# EAGLE board sensor_board_v0.7 (EAGLE 7.6.0)
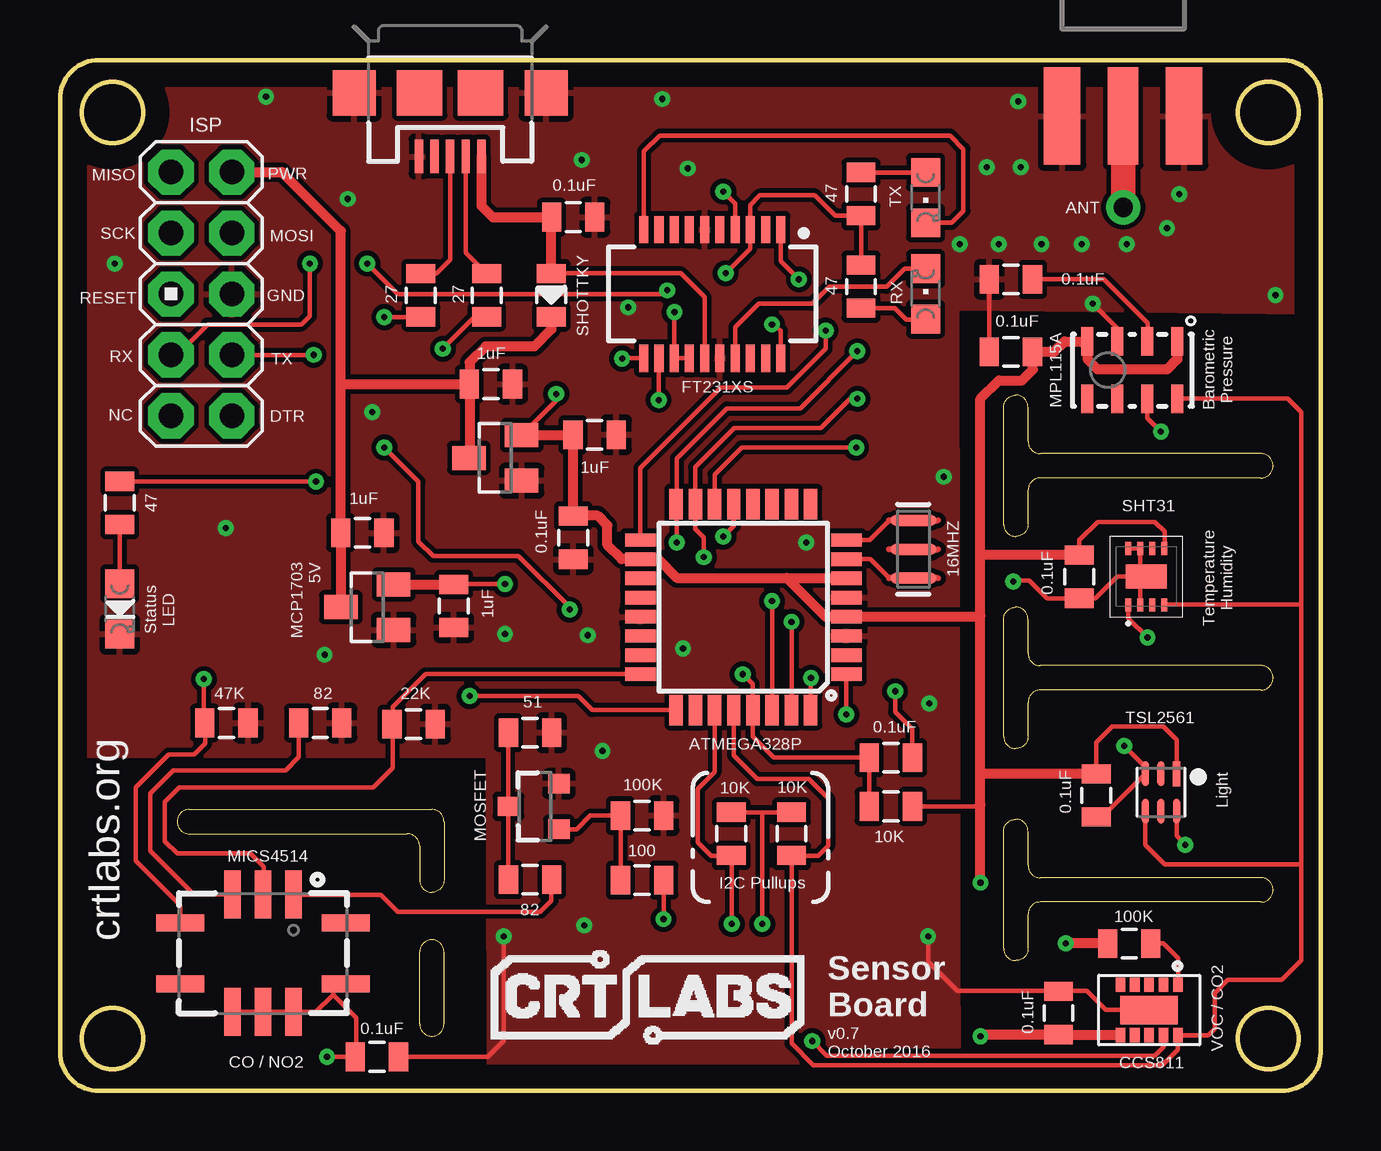
[diagram p0: board, top side]
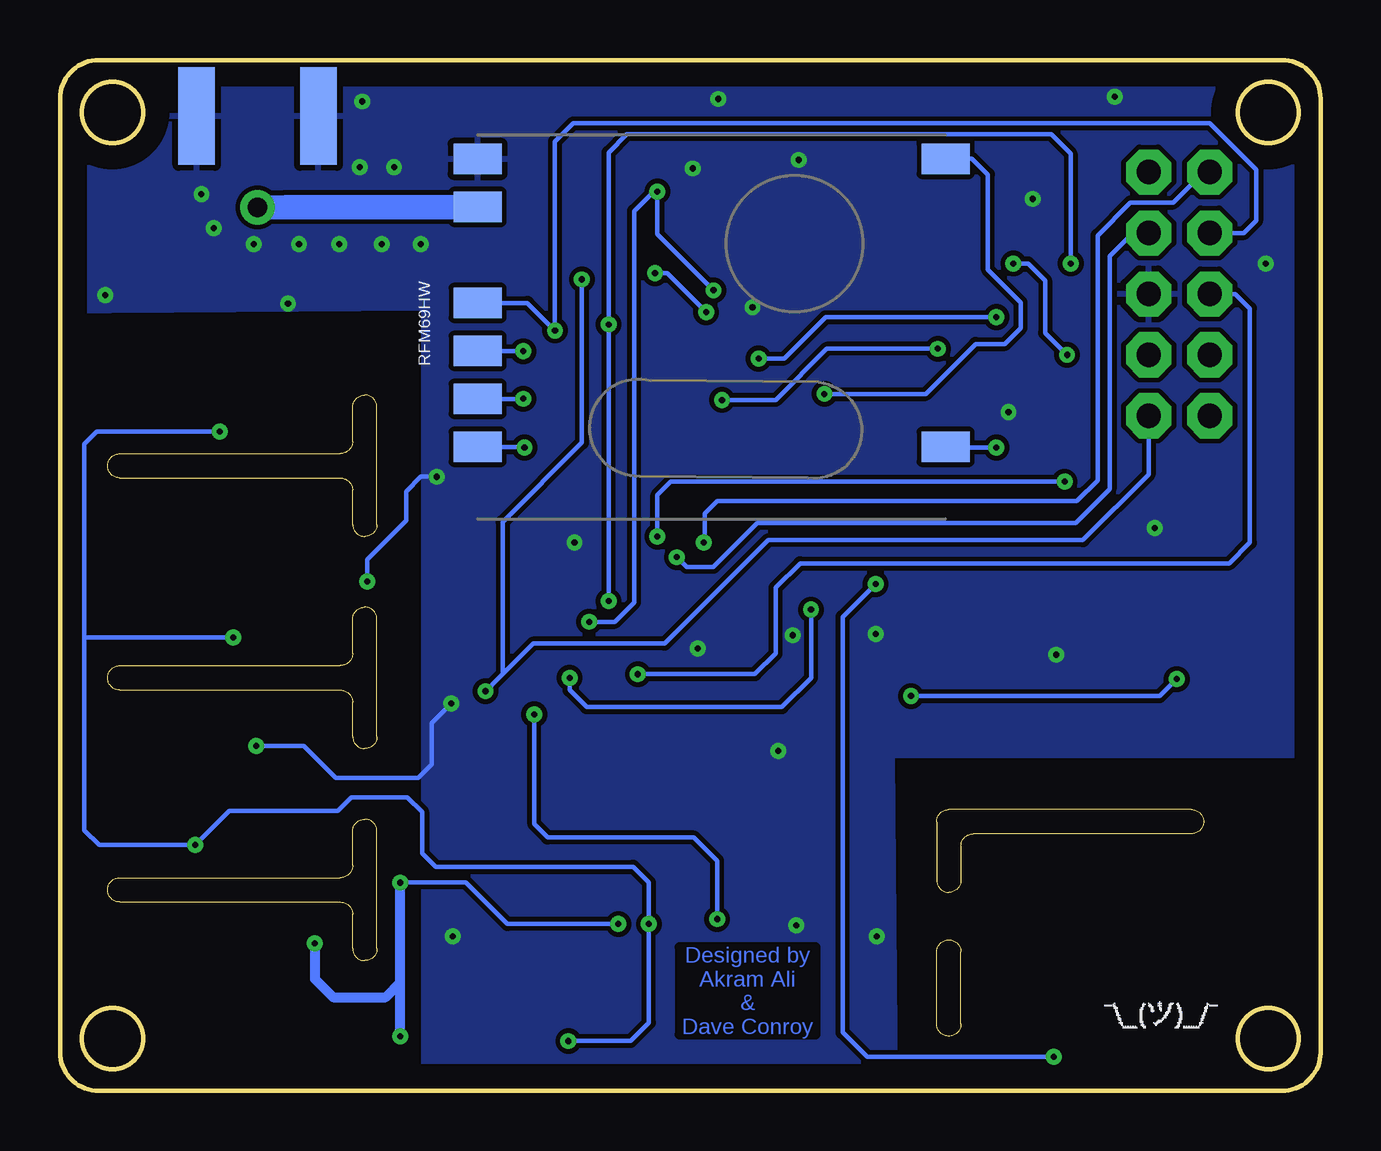
[diagram p1: board, bottom side, seen from below]

Size 52.53 x 42.98 mm. Coordinates in mm from the lower left corner, seen from the top.
Outline: 0,41.35 arc-90 1.63,42.98 50.95,42.98
Outline: 0,1.63 arc90 1.63,0 50.95,0
Outline: 0,41.4 0,1.52
Outline: 50.9,0 arc90 52.53,1.63
Outline: 50.9,42.98 arc-90 52.53,41.35 52.53,1.52
Outline: 50.04,8.89 40.84,8.89 arc-90 40.34,9.4 40.34,10.82 arc90 39.83,11.33 arc90 39.32,10.82 39.32,5.94 arc90 39.83,5.44 arc90 40.34,5.94 40.34,7.37 arc-90 40.84,7.87 50.04,7.87 arc90 50.55,8.38 arc90 50.04,8.89
Outline: 50.04,17.73 40.84,17.73 arc-90 40.34,18.24 40.34,19.66 arc90 39.83,20.17 arc90 39.32,19.66 39.32,14.78 arc90 39.83,14.27 arc90 40.34,14.78 40.34,16.21 arc-90 40.84,16.71 50.04,16.71 arc90 50.55,17.22 arc90 50.04,17.73
Outline: 50.04,26.57 40.84,26.57 arc-90 40.34,27.08 40.34,28.5 arc90 39.83,29.01 arc90 39.32,28.5 39.32,23.62 arc90 39.83,23.11 arc90 40.34,23.62 40.34,25.04 arc-90 40.84,25.55 50.04,25.55 arc90 50.55,26.06 arc90 50.04,26.57
Outline: 5.38,10.72 14.48,10.72 arc-90 14.99,10.21 14.99,8.79 arc90 15.49,8.28 arc90 16,8.79 16,11.23 arc90 15.49,11.73 5.38,11.73 arc90 4.88,11.23 arc90 5.38,10.72
Outline: 16,2.79 16,5.79 arc90 15.49,6.3 arc90 14.99,5.79 14.99,2.79 arc90 15.49,2.29 arc90 16,2.79
Outline: circle at 2.18,40.79 radius 1.27
Outline: circle at 2.18,2.18 radius 1.27
Outline: circle at 50.34,2.18 radius 1.27
Outline: circle at 50.34,40.79 radius 1.27
Copper layers (1*16): Top 0.035mm / dielectric 1.5mm / Bottom 0.035mm
Design rules "default": minimum track width 10mil, minimum drill 24mil, track to track 8mil, track to pad 8mil, pad to pad 8mil, via to via 8mil, smd to smd 8mil, copper to edge 40mil, drill to drill 8mil, minimum pad ring 10mil, minimum via ring 8mil, stop-mask expansion 4mil, vias tented up to drill 0mil, thermal gap 10mil

## Footprints (pad centres in the part's own frame; a part is rotated, then mirrored left to right if it is on the bottom)
0805 = smd 0.8 x 1.2: 1 -0.9,0; 2 0.9,0
AVR_ICSP = drill 1.016 pad 1.88 octagon: 1 -1.27,5.08; 2 1.27,5.08; 3 -1.27,2.54; 4 1.27,2.54; 5 -1.27,0; 6 1.27,0; 7 -1.27,-2.54; 8 1.27,-2.54; 9 -1.27,-5.08; 10 1.27,-5.08
USB-MICROB = smd 0.35 x 1.4: D+ 0,2.65; D- -0.65,2.65; GND 1.3,2.65; ID 0.65,2.65; VBUS -1.3,2.65 | smd 1.8 x 1.9: MT1 -4,0; MT2 4,0 | smd 1.9 x 1.9: P$1 -1.27,0; P$2 1.27,0
CHIPLED_0805 = smd 1.2 x 1.2: A 0,-1.05; C 0,1.05
SPARKFUN-SENSORS_MICS_10-SMD = smd 0.7 x 2: A 1.27,2.45; B 0,2.45; C -1.27,2.45; F -1.27,-2.45; G 0,-2.45; H 1.27,-2.45 | smd 2 x 0.7: D -3.45,1.27; E -3.45,-1.27; J 3.45,-1.27; K 3.45,1.27
SPARKFUN-DISCRETESEMI_SOT23-3 = smd 0.8 x 0.9: 1 -0.95,-1; 2 0.95,-1; 3 0,1.1
TQFP32-08 = smd 1.27 x 0.559: 1 -4.293,2.8; 2 -4.293,2; 3 -4.293,1.2; 4 -4.293,0.4; 5 -4.293,-0.4; 6 -4.293,-1.2; 7 -4.293,-2; 8 -4.293,-2.8; 17 4.293,-2.8; 18 4.293,-2; 19 4.293,-1.2; 20 4.293,-0.4; 21 4.293,0.4; 22 4.293,1.2; 23 4.293,2; 24 4.293,2.8 | smd 0.559 x 1.27: 9 -2.8,-4.293; 10 -2,-4.293; 11 -1.2,-4.293; 12 -0.4,-4.293; 13 0.4,-4.293; 14 1.2,-4.293; 15 2,-4.293; 16 2.8,-4.293; 25 2.8,4.293; 26 2,4.293; 27 1.2,4.293; 28 0.4,4.293; 29 -0.4,4.293; 30 -1.2,4.293; 31 -2,4.293; 32 -2.8,4.293
FN-6 = smd 1.05 x 0.3: 1 -0.775,0.65; 2 -0.775,0; 3 -0.775,-0.65; 4 0.775,-0.65; 5 0.775,0; 6 0.775,0.65
LGA8 = smd 1.2 x 0.5: 1 -1.2,1.875; 2 -1.2,0.625; 3 -1.2,-0.625; 4 -1.2,-1.875; 5 1.2,-1.875; 6 1.2,-0.625; 7 1.2,0.625; 8 1.2,1.875
SSOP20_L = smd 0.381 x 1.143: 1 -2.857,-2.68; 2 -2.223,-2.68; 3 -1.587,-2.68; 4 -0.953,-2.68; 5 -0.318,-2.68; 6 0.318,-2.68; 7 0.953,-2.68; 8 1.587,-2.68; 9 2.223,-2.68; 10 2.857,-2.68; 11 2.857,2.68; 12 2.223,2.68; 13 1.587,2.68; 14 0.953,2.68; 15 0.318,2.68; 16 -0.318,2.68; 17 -0.953,2.68; 18 -1.587,2.68; 19 -2.223,2.68; 20 -2.857,2.68
SHT3X = smd 0.55 x 0.25: P$1 -1.175,0.75; P$2 -1.175,0.25; P$3 -1.175,-0.25; P$4 -1.175,-0.75; P$5 1.175,-0.75; P$6 1.175,-0.25; P$7 1.175,0.25; P$8 1.175,0.75 | smd 1 x 1.7: PAD 0,0
SOT23 = smd 1 x 1.4: 1 -0.95,-1.1; 2 0.95,-1.1; 3 0,1.1
LGA = smd 0.6 x 0.4: 1 0.3,3.2; 2 0.3,2.6; 3 0.3,2; 4 0.3,1.4; 5 0.3,0.8; 6 2.4,0.8; 7 2.4,1.4; 8 2.4,2; 9 2.4,2.6; 10 2.4,3.2 | smd 1.2 x 2.4: 11 1.35,2
LOWPOWERLAB_RFM69W-MINPADS = smd 2 x 1.27: ANA 8,-5; DIO0 -11.5,5; GND 8,-7; MISO 8,1; MOSI 8,3; NSS 8,5; SCK 8,-1; VDD -11.5,-7
SMA_EDGELAUNCH = smd 4.064 x 1.524: GND@1 2.032,-2.54; GND@2 2.032,2.54 | smd 4.064 x 1.524 bottom: GND@3 2.032,2.54; GND@4 2.032,-2.54 | smd 4.064 x 1.27: P 2.032,0
RESONATOR-SMD = smd 0.45 x 1.905: 1 -1.2,0; 2 0,0; 3 1.2,0

## Placement (x,y rotation side)
C1  1uF  [0805]  17.96,29.46 0 top
C3  0.1uF  [0805]  43.18,12.32 270 top
C4  0.1uF  [0805]  42.47,21.44 270 top
C5  0.1uF  [0805]  41.61,3.25 90 top
C6  1uF  [0805]  22.28,27.36 0 top
C7  0.1uF  [0805]  13.21,1.42 0 top
C11  0.1uF  [0805]  21.39,36.42 0 top
C12  0.1uF  [0805]  34.62,13.89 180 top
C13  0.1uF  [0805]  39.62,33.83 180 top
C14  0.1uF  [0805]  39.62,30.81 180 top
C15  0.1uF  [0805]  21.39,23.06 270 top
C16  1uF  [0805]  12.6,23.27 0 top
C17  1uF  [0805]  16.41,20.22 270 top
J2  [AVR_ICSP]  5.89,33.22 0 top
J3  USB-MICROB  [USB-MICROB]  16.26,41.61 180 top
LED2  [CHIPLED_0805]  2.49,20.09 180 top
MICS4514  SPARKFUN-SENSORS_MICS-4514  [SPARKFUN-SENSORS_MICS_10-SMD]  8.46,5.74 0 top
MOSFET  SPARKFUN-DISCRETESEMI_MOSFET-NCHANNELBSS138  [SPARKFUN-DISCRETESEMI_SOT23-3]  19.79,11.86 90 top
R2  100K  [0805]  44.55,6.15 180 top
R4  47  [0805]  2.49,24.51 270 top
R5  10K  [0805]  27.97,10.72 90 top
R6  10K  [0805]  30.48,10.72 90 top
R9  47  [0805]  33.38,33.53 270 top
R10  47  [0805]  33.38,37.39 90 top
R11  SHOTTKY  [0805]  20.47,33.17 90 top
R12  27  [0805]  15.04,33.17 90 top
R13  10K  [0805]  34.62,11.86 0 top
R14  47K  [0805]  6.93,15.34 180 top
R15  82  [0805]  10.85,15.34 180 top
R16  22K  [0805]  14.73,15.29 180 top
R17  51  [0805]  19.58,14.94 180 top
R18  82  [0805]  19.58,8.81 0 top
R19  100K  [0805]  24.26,11.48 180 top
R20  100  [0805]  24.26,8.79 0 top
R21  27  [0805]  17.78,33.17 90 top
RX  Green  [CHIPLED_0805]  36.07,33.22 0 top
TX  Red  [CHIPLED_0805]  36.07,37.24 180 top
U1  ATMEGA328P  [TQFP32-08]  28.47,20.17 180 top
U2  TSL2561  [FN-6]  45.87,12.45 270 top
U4  MPL115A  [LGA8]  44.68,30.05 270 top
U5  FT231XS  [SSOP20_L]  27.18,33.22 180 top
U7  SHT31  [SHT3X]  45.26,21.44 90 top
U8  MCP1703/3.3V  [SOT23]  18.14,26.39 90 top
U9  MCP1703CB  [SOT23]  12.8,20.17 90 top
U10  CCS811  [LGA]  43.38,4.72 270 top
U11  RFM69HW  [LOWPOWERLAB_RFM69W-MINPADS]  27.13,31.85 180 bottom
X1  [SMA_EDGELAUNCH]  44.3,42.67 270 top
Y1  16MHZ  [RESONATOR-SMD]  35.56,22.58 90 top

## Library data of the parts
C1 C6 C11 C16 C17 = SparkFun-Capacitors; OC_NEWARK: unknown
C3-C5 C7 R2 R9-R12 R14-R21 = SparkFun-Passives; OC_NEWARK: unknown
C12-C15 R13 = SparkFun-Passives
J2 = SparkFun-Connectors
J3 = SparkFun-Connectors; PROD_ID: CONN-09505
LED2 RX TX = adafruit; OC_NEWARK: unknown
MICS4514 = MICS-4514_CO_and_NOx_Sensor_Breakout; PROD_ID: COMP-12310
MOSFET = MICS-4514_CO_and_NOx_Sensor_Breakout; PROD_ID: TRANS-00830
R4-R6 = SparkFun-Resistors; OC_NEWARK: unknown
U1 = SparkFun-DigitalIC; MPN: ATMEGA328PB-AU; OC_NEWARK: 58Y6083; PROD_ID: IC-09069
U2 = SparkFun-DigitalIC; DIGIKEY#: TSL2561-FNCT-ND; MANF: AMS-TAOS-USA-Inc.; MANF#: TSL2561FN; MOUSER#: 856-TSL2561T; MPN: TSL2561FN; OC_NEWARK: 82Y5564; PROD_ID: IC-11791
U4 = SparkFun-Sensors
U5 = SparkFun-DigitalIC; PROD_ID: IC-11524
U7 = thomasb9511; MPN: SHT31-DIS-B; OC_NEWARK: 47Y1304
U8 U9 = linear; MPN: MCP1703T-2502E/CB; OC_NEWARK: 18T9177
U10 = CCS811
U11 = RFM69 USB Gateway
X1 = adafruit
Y1 = SparkFun-FreqCtrl; OC_NEWARK: unknown; PROD_ID: XTAL-08900

## Nets
5V: C7.1 C17.1 MICS4514.F MICS4514.G MICS4514.H MICS4514.J U9.2
A0: U1.23
A7: U1.22
ANT: U11.ANA X1.P
D2: U1.32 U11.DIO0
D5: U1.9
DTR: C12.1 J2.10 U5.1
FTDI_VCC: R9.1 R10.1 U5.3 U5.13 U5.14
GND: C1.2 C3.2 C4.2 C5.2 C6.2 C7.2 C11.2 C13.2 C14.2 C15.2 C16.2 C17.2 J2.6 J3.GND J3.MT1 J3.MT2 LED2.C MOSFET.2 R14.1 R15.1 R16.1 R17.1 R19.1 U1.3 U1.5 U1.21 U2.3 U4.3 U5.6 U5.16 U7.P$2 U7.P$7 U7.P$8 U7.PAD U8.1 U9.1 U10.11 U11.GND X1.GND@1 X1.GND@2 X1.GND@3 X1.GND@4 Y1.2
MISO: J2.1 U1.16 U11.MISO
MOSI: J2.4 U1.15 U11.MOSI
N$1: R2.1 U10.1
N$2: R4.1 U1.13
N$3: LED2.A R4.2
N$4: U1.8 Y1.3
N$5: U1.7 Y1.1
N$8: MICS4514.A R18.2
N$12: C13.1 U4.2
N$13: MICS4514.C R15.2
N$17: RX.C U5.17
N$18: TX.C U5.10
N$20: MOSFET.3 R17.2 R18.1
N$23: MOSFET.1 R19.2 R20.1
N$25: R21.1 U5.12
N$26: R12.1 U5.11
N$27: R9.2 RX.A
N$29: R10.2 TX.A
N$32: J3.D- R21.2
N$33: J3.D+ R12.2
PRE: R20.2 U1.1
PWR: C1.1 C16.1 J2.2 R11.1 U8.3 U9.3
RESET: C12.2 J2.5 R13.1 U1.29
RX: J2.7 U1.30 U5.20
SCK: J2.3 U1.17 U11.SCK
SCL: R6.1 U1.28 U2.4 U4.8 U7.P$4 U10.10
SDA: R5.1 U1.27 U2.6 U4.7 U7.P$1 U10.9
SS: U1.14 U11.NSS
TX: J2.8 U1.31 U5.4
VBUS: C11.1 J3.VBUS R11.2 U5.15
VCC: C3.1 C4.1 C5.1 C6.1 C14.1 C15.1 R2.2 R5.2 R6.2 R13.2 U1.4 U1.6 U1.18 U2.1 U4.1 U4.4 U7.P$5 U8.2 U10.6 U11.VDD
VNOX: MICS4514.B R16.2 U1.24
VRED: MICS4514.D R14.2 U1.25

## Tracks (layer width: path | path; a pad name or v marks a point on that pad's centre or on a via)
5V  (via drill 0.25 pad 0.13)
  Top 0.178: MICS4514.J 11.38,4.25 11.38,4.01 | v18.54,21.13 16.42,21.13 C17.1 | MICS4514.F MICS4514.G MICS4514.H 10.66,3.29 11.38,4.01 | v11.13,1.42 C7.1 12.34,1.46 12.34,3.05 11.38,4.01
  Top 0.406: U9.2 C17.1
  Bottom 0.178: v18.54,21.13 19.91,19.76 19.91,2.44 18.9,1.42 v11.13,1.42
ANT  (via drill 0.8 pad 1.42)
  Top 1.016: X1.P v44.3,36.83
  Bottom 1.016: U11.ANA 43.11,36.85 v44.3,36.83
D2  (via drill 0.25 pad 0.13)
  Top 0.178: v21.23,20.07 21.23,20.17 19.1,22.3 15.54,22.3 14.94,22.91 14.94,25.4 v13.51,26.82 | v31.29,17.22 31.27,17.2 U1.32
  Bottom 0.178: v21.23,20.07 21.23,17.22 22.45,16 30.58,16 31.29,16.71 v31.29,17.22 | 15.65,26.83 U11.DIO0 15.6,26.82 v13.51,26.82
DTR  (via drill 0.25 pad 0.13)
  Top 0.178: U5.1 30.04,34.58 v30.78,33.83 | v34.8,16.66 34.8,15.8 35.51,15.09 C12.1
  Bottom 0.178: v30.78,33.83 30.78,27.03 34.09,23.72 34.09,17.37 | 34.09,17.37 34.26,17.2 v34.8,16.66 | J2.10 7.16,25.7 9.91,22.96 23.01,22.96 27.33,18.64 32.82,18.64 34.09,17.37
FTDI_VCC  (via drill 0.25 pad 0.13)
  Top 0.178: U5.14 U5.13 25.6,30.56 v25.6,32.46 | R9.1 R10.1 32.29,36.49 31.45,37.34 29.16,37.34 28.75,36.93 28.75,35.92 | 28.75,35.92 U5.3 | 28.75,35.92 28.75,35.1 v27.74,34.09
  Bottom 0.178: v27.74,34.09 27.23,34.09 v25.6,32.46
GND  (via drill 0.25 pad 0.13)
  Top 0.178: U10.11 43.56,3.37 42.77,4.17 41.62,4.17 | 41.62,4.17 C5.2 | 41.62,4.17 37.39,4.17 36.17,5.38 v36.17,6.45 | U7.P$2 45.01,21.19 U7.PAD | U7.P$8 U7.P$7 45.01,21.69 U7.PAD | U7.PAD 44.04,21.44 43.14,20.54 C4.2 41.13,20.54 40.39,21.29 39.78,21.29 v39.73,21.23 | C3.2 43.42,11.42 U2.3 45.22,13.5 v44.35,14.38 | C14.2 C13.2 | U4.3 44.05,31.79 v43.03,32.82 | C7.2 17.83,1.42 18.49,2.08 v18.49,6.45
  Bottom 0.178: v39.73,21.23 39.73,22.15 38.1,23.77 38.1,24.99 37.49,25.6 v36.83,25.6 | v36.22,16.15 37.03,15.34 37.03,13.61 37.59,13.06 41.05,13.06 42.37,14.38 v44.35,14.38
  other vias: 40.03,38.51 26.16,38.46 11.02,18.19 11.99,37.19 13,28.3 22,19 23.67,32.66 6.91,23.47 22.61,14.17 38.61,38.51 46.63,37.39 46.13,35.97 44.45,35.31 42.57,35.31 40.89,35.31 39.12,35.31 37.49,35.31 21.74,38.81 2.29,34.49 18.54,19.05 25.96,18.44 31.09,22.86 21.84,6.91 50.65,33.17 25.1,41.35 39.93,41.25 8.59,41.45
  pour Top: -1.17,45.57 55.63,45.36 55.78,32.41 37.39,32.61 37.44,-2.29 17.88,-2.29 17.83,13.97 -1.42,13.97 -1.42,40.89
  pour Bottom: -1.32,45.57 55.58,45.42 55.63,32.46 37.39,32.61 37.39,-2.18 17.68,-2.18 17.83,13.97 -1.47,13.97 -1.47,41
MISO  (via drill 0.25 pad 0.13)
  Top 0.178: v33.22,30.84 30.84,28.45 27.79,28.45 25.7,26.37 25.7,24.49 U1.16 25.7,24.43 v25.7,22.86
  Bottom 0.178: U11.MISO 33.24,30.85 v33.22,30.84 | J2.1 4.88,38.3 6.15,37.03 7.92,37.03 9.3,35.66 9.3,25.45 10.16,24.59 25.15,24.59 25.65,24.08 25.65,22.81 v25.7,22.86
MOSI  (via drill 0.25 pad 0.13)
  Top 0.178: v33.22,28.85 32.92,28.85 31.7,27.64 28.09,27.64 26.47,26.01 U1.15 26.47,23.42 26.82,23.06 v26.82,22.25
  Bottom 0.178: U11.MOSI v33.23,28.85 v33.22,28.85 | J2.4 7.82,35.76 8.79,34.8 8.79,25.1 10.21,23.67 23.47,23.67 25.3,21.84 26.42,21.84 v26.82,22.25
N$1
  Top 0.178: R2.1 45.97,6.15 46.58,5.54 U10.1 | U10.1
N$2  (via drill 0.25 pad 0.13)
  Top 0.178: U1.13 28.07,23.55 v27.64,23.11 | R4.1 10.66,25.41 v10.67,25.4
  Bottom 0.178: v27.64,23.11 27.64,24.84 27.08,25.4 v10.67,25.4
N$3
  Top 0.178: R4.2 LED2.A
N$4
  Top 0.178: U1.8 33.73,22.97 34.54,23.78
N$5
  Top 0.178: U1.7 33.76,22.17 34.54,21.38
N$8
  Top 0.178: R18.2 20.47,8.8 20.47,7.92 20.02,7.47 14.07,7.47 13.36,8.18 9.74,8.18 MICS4514.A
N$12
  Top 0.178: C13.1 43.48,33.83 45.31,32 45.31,31.26 U4.2
N$13
  Top 0.178: R15.2 9.96,15.33 9.96,13.92 9.4,13.36 4.72,13.36 3.76,12.4 3.76,10.01 5.58,8.19 MICS4514.C
N$17
  Top 0.178: RX.C 35.19,34.27 34.44,33.53 32.05,33.53 31.34,32.82 29.11,32.82 28.14,31.85 28.14,30.56 U5.17
N$18
  Top 0.178: TX.C 37.15,36.19 37.64,36.68 37.64,39.27 37.08,39.83 24.99,39.83 24.33,39.17 24.33,35.92 U5.10
N$20
  Top 0.178: R18.1 MOSFET.3 R17.2
N$23
  Top 0.178: MOSFET.1 21.53,10.91 22.1,11.48 R19.2 R20.1
N$25  (via drill 0.25 pad 0.13)
  Top 0.178: R21.1 17.29,32.27 v15.95,30.94 | v24.94,28.8 24.94,30.53 U5.12
  Bottom 0.178: v15.95,30.94 20.57,30.94 22.71,28.8 v24.94,28.8
N$26  (via drill 0.25 pad 0.13)
  Top 0.178: U5.11 23.43,30.54 v23.42,30.53 | v13.51,32.26 15.02,32.26 R12.1
  Bottom 0.178: v23.42,30.53 22.35,30.53 20.62,32.26 v13.51,32.26
N$27
  Top 0.178: R9.2 34.78,32.63 35.26,32.16 36.05,32.16 RX.A
N$29
  Top 0.178: TX.A R10.2
N$32
  Top 0.178: J3.D- 16.91,34.95 R21.2
N$33
  Top 0.178: R12.2 15.68,34.07 16.26,34.65 J3.D+
PRE  (via drill 0.25 pad 0.13)
  Top 0.178: R20.2 v25.16,7.17 v25.15,7.16 | v32.77,15.7 U1.1
  Bottom 0.178: v25.15,7.16 25.15,9.6 26.11,10.57 32.21,10.57 32.77,11.13 v32.77,15.7
PWR
  Top 0.406: R11.1 20.47,31.75 19.76,31.04 17.73,31.04 17.07,30.38 17.07,29.48 | 17.07,29.48 C1.1 11.7,29.46 | 17.07,29.48 17.07,26.42 U8.3 | U9.3 C16.1 11.7,29.46 | J2.2 9.25,38.3 11.7,35.85 11.7,29.46
RESET  (via drill 0.25 pad 0.13)
  Top 0.178: R13.1 C12.2 29.74,13.89 28.85,14.78 28.85,15.86 | 28.85,15.86 U1.29 | 28.85,15.86 28.85,16.97 v28.45,17.37
  Bottom 0.178: v28.45,17.37 23.57,17.37 22.71,18.24 22.71,20.98 21.69,22 3.81,22 2.95,22.86 2.95,32.61 3.56,33.22 J2.5
RX  (via drill 0.25 pad 0.13)
  Top 0.178: U5.20 30.04,31.69 v29.67,31.95 | U1.30 v29.67,20.42 | J2.7 4.88,30.68 6.15,31.95 10.06,31.95 10.41,32.31 v10.41,34.49
  Bottom 0.178: v29.67,20.42 v29.67,31.95 29.67,39.12 28.91,39.88 11.23,39.88 10.41,39.07 v10.41,34.49
SCK  (via drill 0.25 pad 0.13)
  Top 0.178: U1.17 24.18,25.96 27.53,29.31 30.28,29.31 31.9,30.94 v31.9,31.7
  Bottom 0.178: U11.SCK 33.05,32.85 v31.9,31.7 31.9,39.57 31.14,40.34 4.62,40.34 2.69,38.4 2.69,36.27 3.2,35.76 J2.3
SCL
  Top 0.178: U1.28 28.07,13.99 29.06,13 31.19,13 32,12.19 32,10.21 31.6,9.8 30.49,9.8 R6.1 30.48,1.98 31.39,1.07 45.92,1.07 46.58,1.73 U10.10 47.84,2.32 48.11,2.59 48.11,4.06 48.67,4.62 50.9,4.62 51.71,5.44 51.71,9.45 | U2.4 45.21,11.66 45.21,10.26 46.02,9.45 51.71,9.45 | U4.8 51.16,28.85 51.71,28.3 51.71,20.27 | 51.71,9.45 51.71,20.27 | U7.P$4 51.71,20.27
SDA  (via drill 0.25 pad 0.13)
  Top 0.178: U1.27 27.27,13.3 26.57,12.6 26.57,10.36 27.13,9.8 27.95,9.8 R5.1 27.99,9.79 v27.99,6.96 | U10.9 45.98,1.84 45.62,1.47 31.95,1.47 v31.34,2.08 | U7.P$1 44.51,19.7 v45.31,18.9 | U4.7 45.3,28.05 v45.87,27.48 | U2.6 46.52,10.63 v46.89,10.26
  Bottom 0.178: v31.34,2.08 28.75,2.08 27.99,2.84 v27.99,6.96 27.99,8.69 28.65,9.35 36.88,9.35 37.44,9.91 37.44,11.63 38.05,12.24 40.39,12.24 40.94,11.68 45.47,11.68 v46.89,10.26 50.9,10.26 51.51,10.87 51.51,18.95 | 51.51,18.95 51.51,26.97 51,27.48 v45.87,27.48 | v45.31,18.9 51.46,18.9 51.51,18.95
SS  (via drill 0.25 pad 0.13)
  Top 0.178: v33.17,26.82 28.4,26.82 27.28,25.7 U1.14
  Bottom 0.178: U11.NSS 33.2,26.85 v33.17,26.82
TX  (via drill 0.25 pad 0.13)
  Top 0.178: U5.4 28.14,35.92 28.14,36.98 v27.64,37.49 | v10.57,30.68 J2.8 | v12.8,34.49 14.07,33.22 25.15,33.22 v25.3,33.38 | v30.48,19.56 U1.31
  Bottom 0.178: v25.3,33.38 27.64,35.71 v27.64,37.49 27.79,37.49 28.6,36.68 28.6,20.37 29.41,19.56 v30.48,19.56 | v12.8,34.49 12.19,34.49 11.48,33.78 11.48,31.6 v10.57,30.68
VBUS
  Top 0.178: U5.15 26.86,33.08 25.86,34.09 R11.2
  Top 0.406: J3.VBUS 17.56,36.9 18.03,36.42 C11.1 20.47,36.41 R11.2
VCC  (via drill 0.25 pad 0.13)
  Top 0.178: 41.63,2.32 C5.1 | 38.42,2.35 v38.35,2.29 | C4.1 42.47,22.96 43.23,23.72 45.62,23.72 46.02,23.32 U7.P$5 | 27.98,11.63 R5.2 29.26,11.62 | R6.2 29.26,11.62 | 29.26,11.62 v29.26,6.96 | R13.2 38.28,11.86 38.35,11.94 | C3.1 43.18,14.53 43.84,15.19 45.97,15.19 46.53,14.63 46.53,13.23 U2.1 | v20.68,29.06 20.68,28.78 U8.2
  Top 0.406: U8.2 21.36,27.34 | 21.36,27.34 C6.1 | U10.6 41.63,2.32 | 42.45,22.35 C4.1 38.47,22.34 38.35,22.45 | C3.1 38.35,13.21 | R2.2 v41.91,6.15 | C5.1 38.42,2.35 | v38.35,8.69 38.35,11.94 38.35,13.21 | 38.35,13.21 38.35,19.81 | 38.35,19.81 38.35,22.45 | 38.35,22.45 38.35,28.85 39.12,29.62 40.08,29.62 40.54,30.07 40.54,30.8 C14.1 41.43,30.81 41.86,31.24 U4.4 42.82,31.23 42.82,30.48 43.23,30.07 46.13,30.07 46.55,30.5 U4.1 | 21.36,27.34 21.36,23.99 C15.1 21.4,23.98 22.4,23.98 22.81,23.57 22.81,22.76 23.4,22.17 U1.18 24.92,22.17 25.7,21.39 30.28,21.39 | 30.28,21.39 32.75,21.39 U1.6 | 30.28,21.39 31.9,19.77 U1.4 38.3,19.76 38.35,19.81
  Bottom 0.178: v29.26,6.96 33.88,6.96 35.61,8.69 v38.35,8.69 | v20.68,29.06 16.46,29.06 14.38,31.14 13.16,31.14 12.5,31.8 12.5,32.87 13.87,34.24 13.87,38.2 14.53,38.86 U11.VDD
  Bottom 0.406: v41.91,6.15 41.91,4.67 41.15,3.91 38.96,3.91 38.35,4.52 | 38.35,4.52 v38.35,8.69 | v38.35,2.29 38.35,4.52
VNOX
  Top 0.178: 13.87,15.25 13.87,13.46 13.06,12.65 4.98,12.65 4.37,12.04 4.37,10.41 4.88,9.91 7.92,9.91 8.48,9.35 8.48,8.22 MICS4514.B | 13.87,15.25 R16.2 | 13.87,15.25 13.87,16 15.24,17.37 U1.24
VRED  (via drill 0.25 pad 0.13)
  Top 0.178: U1.25 22.17,15.88 21.59,16.46 v17.07,16.46 | v5.99,17.17 5.99,15.38 R14.2 6.05,15.33 6.05,14.48 5.59,14.02 4.52,14.02 3.15,12.65 3.15,9.6 5.01,7.74 MICS4514.D
  Bottom 0.178: v17.07,16.46 6.71,16.46 v5.99,17.17

## Text on the board
Bottom: Designed by / Akram Ali / & / Dave Conroy
_tsilk: ISP | MISO | PWR | TX | ANT | SCK | MOSI | RX | RESET | GND | RX | TX | Barometric / Pressure | NC | DTR | MCP1703 / 5V | Temperature / Humidity | Status / LED | Light | I2C Pullups | crtlabs.org | Sensor / Board | VOC / CO2 | CO / NO2 | v0.7 / October 2016